# Altium PCB PCB1.PcbDoc
Units mil, origin at the board's own origin, x right, y up, seen from the top; angles counter-clockwise.
Board outline 1040 x 1460 mil, 2 copper layers (Top Layer, Bottom Layer); 25 components, 13 nets, 61 pads, 68 vias.
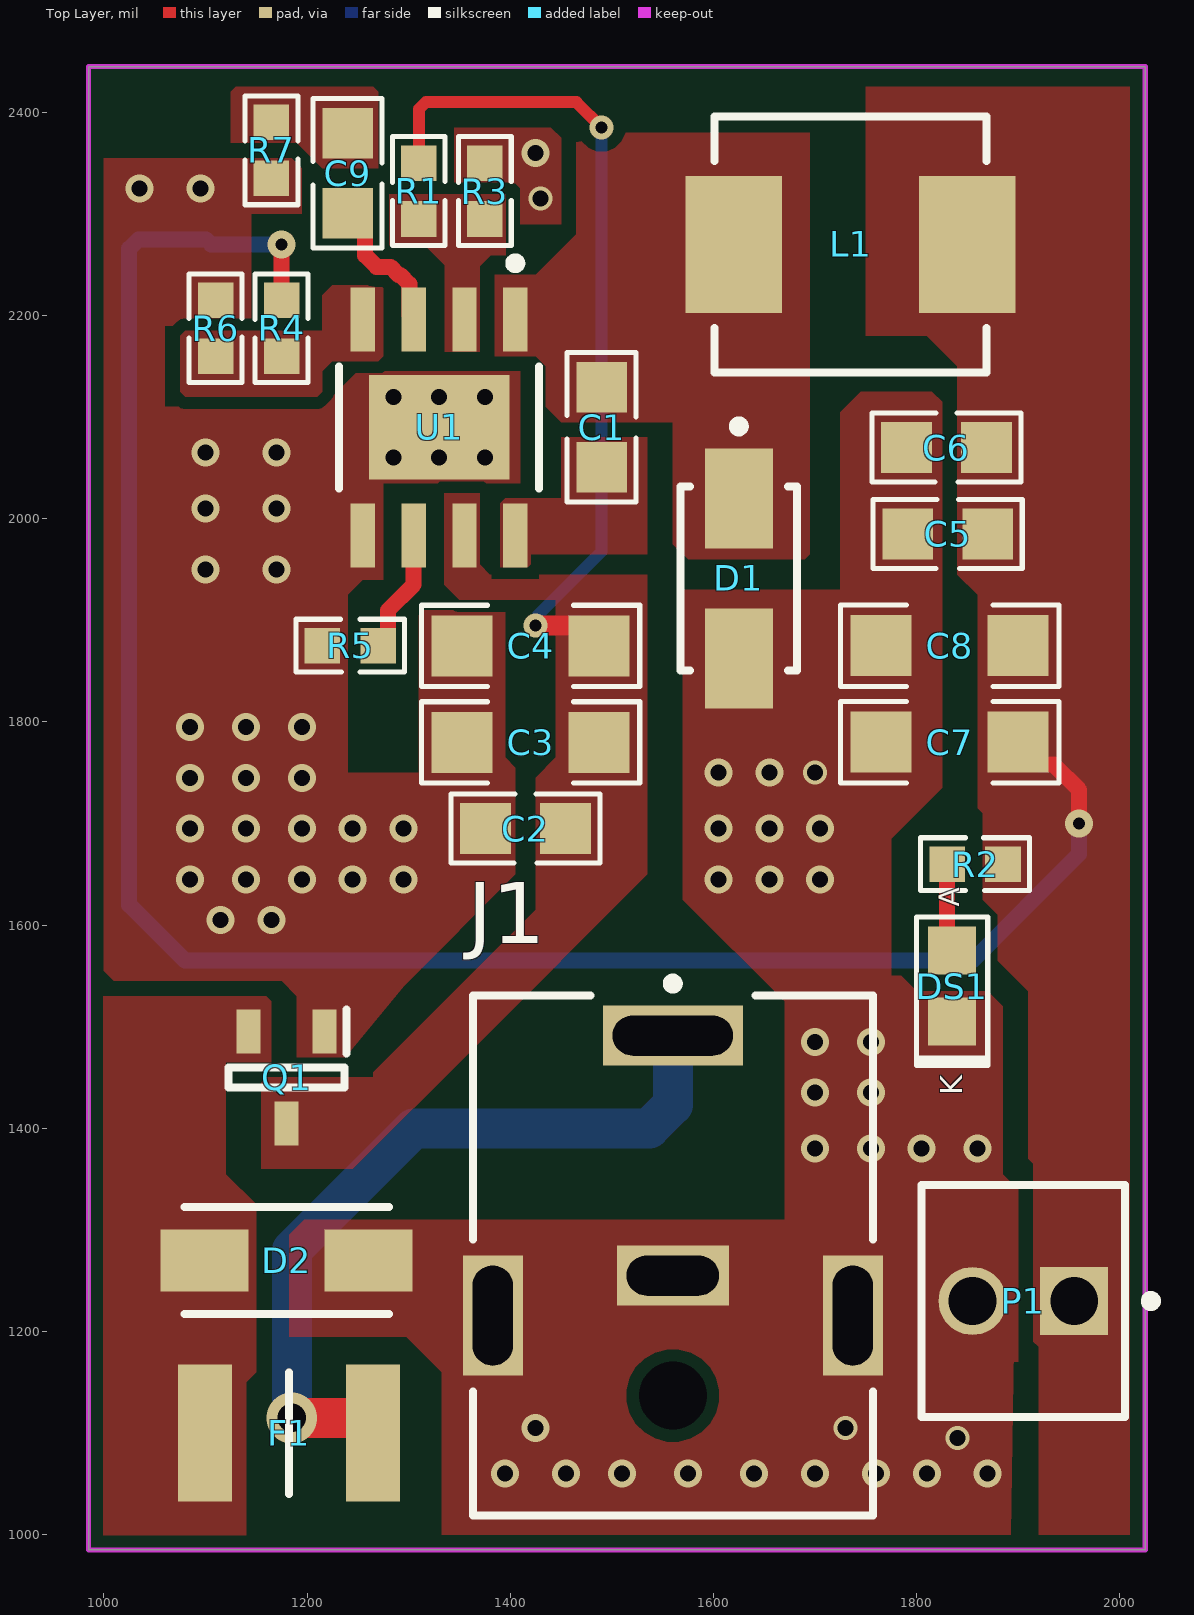
[diagram p0: Top Layer view]
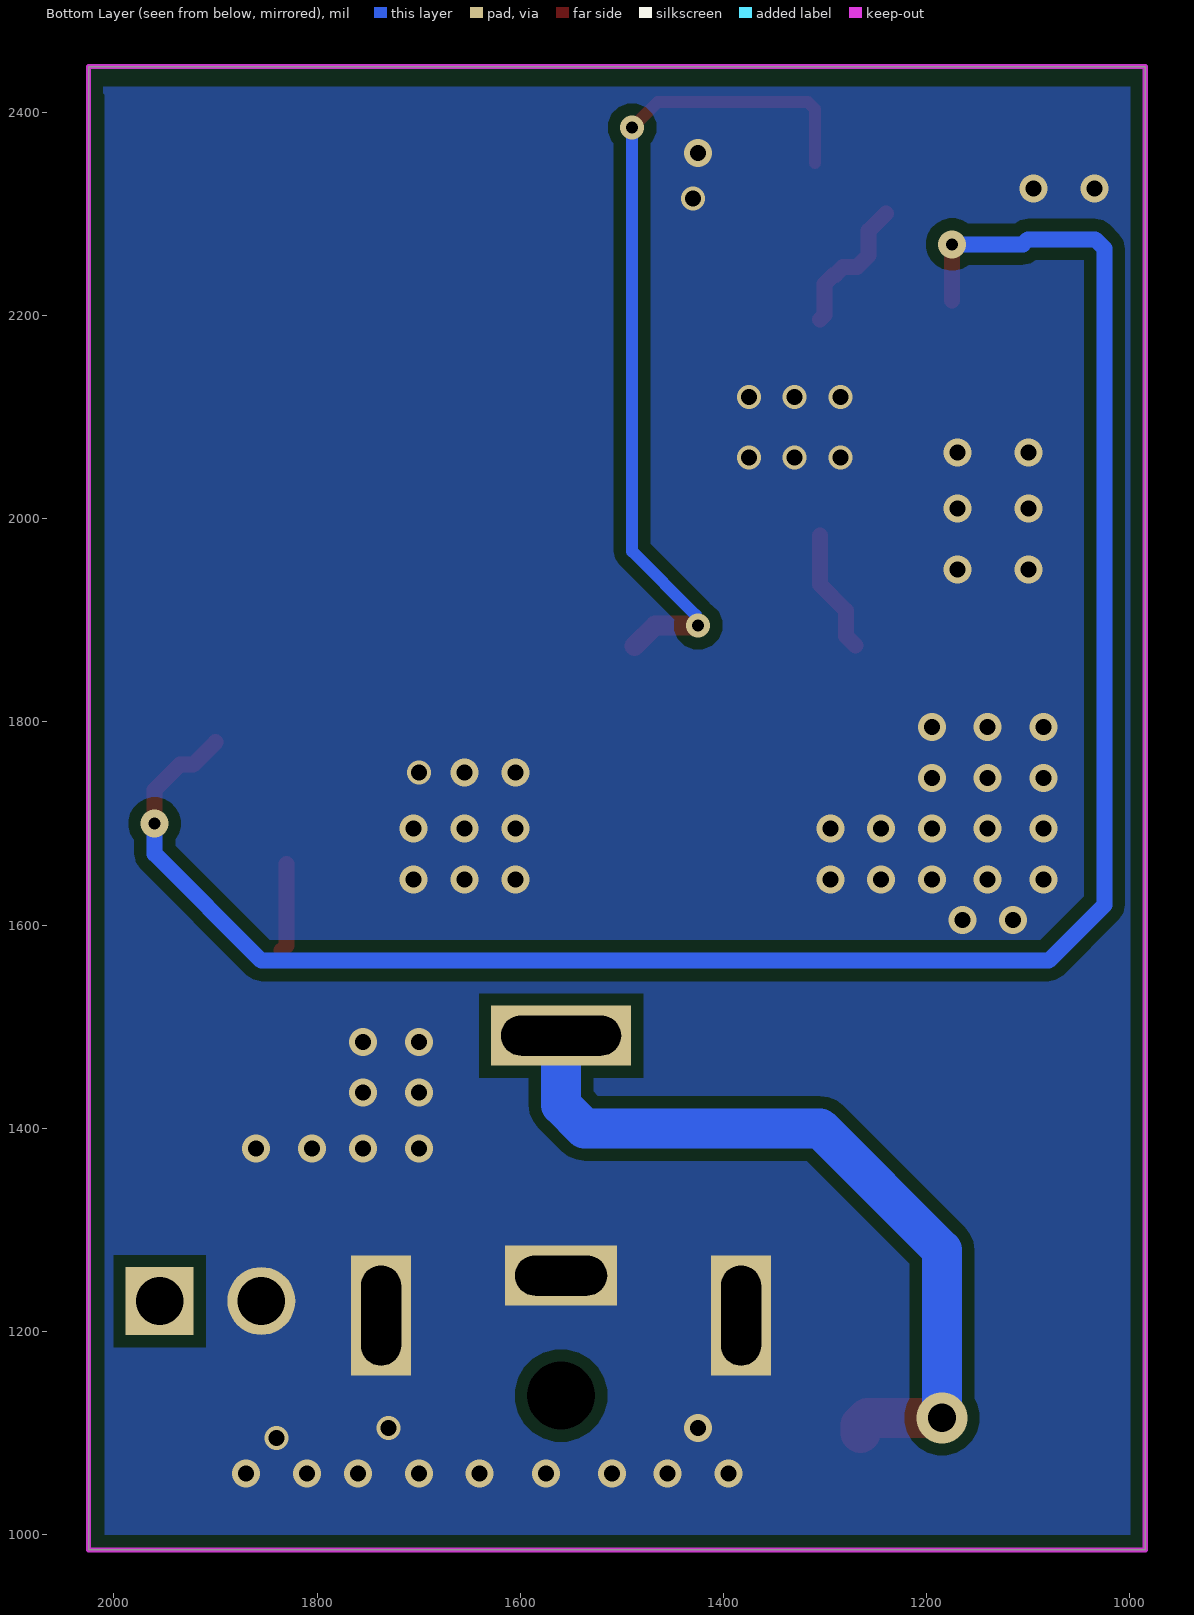
[diagram p1: Bottom Layer view, seen from below]
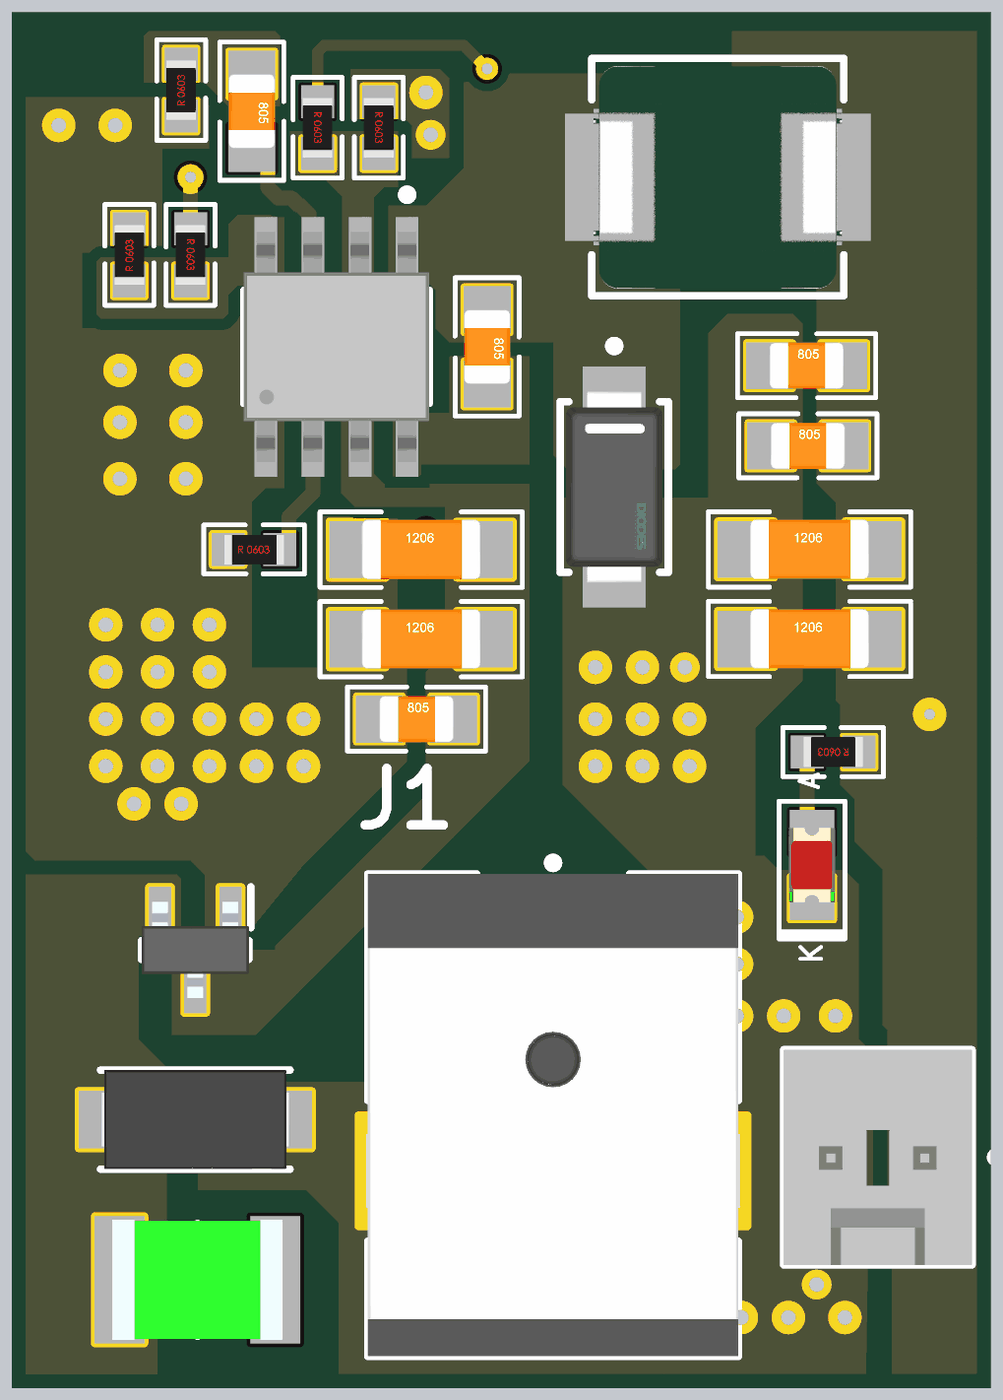
[diagram p2: 3D render of the assembled board from above, using the file's embedded part models]

## Layer stack, top to bottom
Top Solder: solder mask 0.4, Solder Resist, Dk 3.5
Top Layer: signal copper 1.4
Dielectric 1: dielectric 12.6, FR-4, Dk 4.8
Bottom Layer: signal copper 1.4
Bottom Solder: solder mask 0.4, Solder Resist, Dk 3.5

## Board outline
985,985 985,2445 2025,2445 2025,985 1625,985

## Design rules (kind name [scope] priority, off if disabled: settings)
Clearance [All] p1: gap=11.81 ignorepadtopadclearanceinfootprint=TRUE
HoleSize [All] p1: absolutevalues=TRUE maxlimit=118.11 minlimit=1 maxpercent=80.000 minpercent=20.000
PolygonConnect [All] p1: connectstyle=Direct reliefconductorwidth=10 reliefentries=4 polygonreliefangle="90 Angle" airgapwidth=10
RoutingVias [All] p1: holewidth=11.81 width=35.43 viastyle="Through Hole" minholewidth=11.81 minwidth=21.65 maxholewidth=23.62 maxwidth=27.56
SolderMaskExpansion [All] p1: expansion=4 istentingtop=FALSE
Width [All] p1: maxlimit=39.37 minlimit=11.81 preferedwidth=11.81
29 further rules are at their usual default settings.

## Components (designator, comment, footprint, x,y, rotation, side; value= is the part's Value field where it differs from the comment)
C1 "0.1uF" CAP_0805 1490,2090 r270 top
C2 "0.1uF" CAP_0805 1415,1695 r0 top
C3 "10uF" CAP_1206 1420,1780 r0 top
C4 "100uF" CAP_1206 1420,1875 r0 top
C5 "0.1uF" CAP_0805 1830.63,1985 r0 top
C6 "0.22uF" CAP_0805 1829.37,2070 r0 top
C7 "100uF" CAP_1206 1832.49,1780.2 r0 top
C8 "100uF" CAP_1206 1832.49,1875.2 r0 top
C9 "150pF" CAP_0805 1240,2340 r270 top
D1 "B340A-13-F" FP-SMA-MFG 1625,1941.26 r270 top
D2 "824501121" DIONM5127X250N 1180,1270 r180 top
DS1 "GREEN LED" LED_0805 1835,1540 r90 top
F1 "MINIASMDC150F_16-2" FUSC4632X48N 1182.32,1100 r180 top
J1 "PJ-063AH" CUI-PJ-063AH_V 1560,1255 r270 top
L1 "ETQ-P3M150KVN" FP-PCC-M0630M-LP-MFG 1735,2270 r0 top value=15uH
P1 "22-27-2021" MOLX-22-27-2021_V 1905,1230 r180 top
Q1 "BSS308PE" SOT95P260X110-3N 1180,1450 r270 top
R1 "100K" RES_0603 1310,2322.5 r270 top
R2 "2k" RES_0603 1857.5,1660 r180 top
R3 "24.9K" RES_0603 1375,2322.5 r270 top
R4 "210K" RES_0603 1175,2187.5 r270 top
R5 "100K" RES_0603 1242.5,1875 r0 top
R6 "40.2K" RES_0603 1110,2187.5 r90 top
R7 "100K" RES_0603 1165,2362.5 r90 top
U1 "MP1584EN-LF-Z" FP-MP1584EN-LF-Z-MFG 1330,2090 r270 top

## Footprints (in the part's own frame and the unit in brackets; to place one, negate y for a bottom-side part, rotate by r counter-clockwise, add the part's x,y. Pads: shape width x height; smd on the part's side, far side on the other; paste and mask are expansions set on the pad)
CAP_0805 [mil] "Ceramic Capacitor"
  rect 50x50 smd mask+3: 1(-39.37,0) 2(39.37,0)
  silkscreen extent -73,-34 73,34, body extent -39,-25 39,25, height 31
CAP_1206 [mil] "Ceramic Capacitor"
  rect 60x60 smd: 1(-67.49,-0.2) 2(67.51,-0.2)
  silkscreen extent -107,-40 108,40, body extent -63,-31 63,32, height 39
CUI-PJ-063AH_V [mm] "THD, 2-Leads, Body 13x10mm, Height 9mm"
  rect 1.5x3.5 hole 1 slot 3 at 90 deg: 1(-6,0)
  rect 1.5x2.8 hole 1 slot 2.3 at 90 deg: 2(0,0)
  rect 3x1.5 hole 1 slot 2.5 at 0 deg: 3(1,4.5) 4(1,-4.5)
  round 1.4 hole 1.7 unplated: 5(3,0)
  silkscreen extent -7.42,-5 6,5, body extent -7,-5.15 6,5.15, height 9
DIONM5127X250N [mm]
  rect 2.2x1.55 smd: 1(-2.05,0) 2(2.05,0)
  silkscreen extent -2.56,-1.34 2.56,1.34, body extent -2.56,-1.34 2.56,1.34, height 2.5
FP-MP1584EN-LF-Z-MFG [mm]
  rect 1.6x0.61 smd paste+0 mask+0: 1(-2.7,1.905) 2(-2.7,0.635) 3(-2.7,-0.635) 4(-2.7,-1.905) 5(2.7,-1.905) 6(2.7,-0.635) 7(2.7,0.635) 8(2.7,1.905)
  rect 2.62x3.51 smd paste+0 mask+0: 9(0,0)
  silkscreen extent -4.22,-2.5 1.53,2.5, body extent -3.6,-2.6 3.6,2.6, height 0.25
FP-PCC-M0630M-LP-MFG [mil]
  rect 95x135 smd paste+0 mask+0: 1(-115,0) 2(115,0)
  silkscreen extent -134,-126 134,126, body extent -166,-130 166,130, height 10
FP-SMA-MFG [mm]
  rect 2.5x1.7 smd paste+0 mask+0: 1(-2,0) 2(2,0)
  silkscreen extent -3.92,-1.46 2.3,1.46, body extent -3.35,-1.56 3.35,1.56, height 0.25
FUSC4632X48N [mm]
  rect 1.35x3.43 smd: 1(-2.1,0) 2(2.1,0)
  silkscreen extent 0,-1.52 0,1.52, body extent -2.3,-1.62 2.3,1.62, height 0.48
LED_0805 [mm] "LED"
  rect 1.2x1.2 smd mask+0.076: A(0.889,0) K(-0.889,0)
  silkscreen extent -1.99,-0.89 1.73,0.89, body extent -1.01,-0.62 1.01,0.63, height 1.1
MOLX-22-27-2021_V [mm] "Header, 2-Leads, Body 5.8x5.08mm"
  rect 1.7x1.7 hole 1.19: 1(-1.27,0)
  round 1.7 hole 1.19: 2(1.27,0)
  silkscreen extent -3.32,-2.9 2.54,2.9, body extent -2.54,-2.9 2.54,2.9, height 11.72
RES_0603 [mil] "CASE: 0603"
  rect 35x35 smd mask+3: 1(-27.5,0) 2(27.5,0)
  silkscreen extent -53,-26 54,26, body extent -31,-16 31,16, height 18
SOT95P260X110-3N [mm]
  rect 1.1x0.6 smd: 1(-1.15,0.95) 2(-1.15,-0.95) 3(1.15,0)
  silkscreen extent -1.7,-1.45 0.25,1.5, body extent -1.3,-1.45 1.3,1.45, height 1.1

## Part data
C1 C2 C5: library part CAP_0.1uF-50V-20%-0805, "0.1µF ±20% 50V Ceramic Capacitor X7R 0805 (2012 Metric)", Alternate Part Number-1=NA, Case/Package=0805, Manufacturer="Samsung Electro-Mechanics", Manufacturer Part Number=CL21B104MBCNNNC, Supplier Part Number-1=0805B104K500CT, Supplier-1=SIRICOM
C3: library part CAP_10uF-50V-10%-1206, "10µF ±10% 50V Ceramic Capacitor X7R 1206 (3216 Metric)", Alternate Part Number-1=GRT31CR61H106ME01L, Case/Package=1206, Manufacturer=KEMET, Manufacturer Part Number=CL31B106KBHNNNE, Supplier Part Number-1=CC1206KKX5R9BB106, Supplier-1=SIRICOM
C4 C7 C8: library part CAP_0.1uF-50V-5%-1206, "100µF ±5% 50V Ceramic Capacitor X7R 1206 (3216 Metric)", Alternate Part Number-1=NA, Case/Package=1206, Manufacturer=KEMET, Manufacturer Part Number=C1206C104J5RACTU, Supplier Part Number-1=1206B104J500CT, Supplier-1=SIRICOM
C6: library part CAP_0.22uF-50V-10%-0805, "0.22µF ±10% 50V Ceramic Capacitor X7R 0805 (2012 Metric)", Alternate Part Number-1=0805F224M500NT, Case/Package=0805, Manufacturer=Murata, Manufacturer Part Number=GRM21BR71H224KA01L, Supplier Part Number-1=0805B224K500CT, Supplier-1=SIRICOM
C9: library part CAP_150pF-50V-10%-0805, "150pF ±10% 50V Ceramic Capacitor C0G, NP0 0805 (2012 Metric)", Alternate Part Number-1=NA, Case/Package=0805, Manufacturer="AVX Corporation", Manufacturer Part Number=08055A151KAT2A, Supplier Part Number-1="478-10501-1-ND - Cut Tape (CT)", Supplier-1=Digikey
D1: library part CMP-1667-00003-3, "DIODE SCHOTTKY 40V 3A SMA", Average Rectified Current=3A, Capacitance=250pF, Case/Package=SMA, Forward Voltage=500mV, Max Forward Surge Current (Ifsm)=80A, Max Operating Temperature=125°C, Max Repetitive Reverse Voltage (Vrrm)=40V, Max Reverse Current=500uA, Min Operating Temperature=-55°C, Package Quantity=5000, Contact Plating=Tin, Current=3A, Current Rating=3A, Element Configuration=Single, Forward Current=3A, Height=2.3mm, Lead Free="Lead Free", Length=4.6mm, Max Reverse Voltage (DC)=40V, Mount="Surface Mount", Number of Pins=2, Output Current=3A, Packaging="Tape and Reel", Peak Non-Repetitive Surge Current=80A, Polarity=Standard, Radiation Hardening=No, REACH SVHC="No SVHC", RoHS Compliant=Yes, Series=-, Termination=SMD/SMT, Voltage=40V, Voltage Rating (DC)=40V, Weight=0.002258oz, Width=2.92mm
D2: "TVS Diode (Bi-directional)", Manufacturer_Name="Wurth Elektronik", Mouser Part Number=710-824501121, Datasheet Link=http://uk.rs-online.com/web/p/products/9217298P, Height=2.5mm, Manufacturer_Part_Number=824501121, Mouser Price/Stock=https://www.mouser.co.uk/ProductDetail/Wurth-Elektronik/824501121?qs=16w8nSHsg3tpLWkpbtDAQg%3D%3D
DS1: library part LED_GREEN-2.2-20mA-0805, "Green 569nm LED Indication - Discrete 2.1V 0805 (2012 Metric)", Alternate Part Number-1=NA, Case/Package=0805, Manufacturer="Vishay Lite-On", Manufacturer Part Number=LTST-C171GKT, Supplier Part Number-1=LTST-C171GKT, Supplier-1="SP ROAD"
F1: "Fuse", Arrow Part Number=MINIASMDC150F/16-2, Manufacturer_Name=LITTELFUSE, Mouser Part Number=650-MINIASMDC150F/16, Arrow Price/Stock=https://www.arrow.com/en/products/miniasmdc150f16-2/littelfuse, Datasheet Link=https://componentsearchengine.com/Datasheets/1/MINIASMDC150F_16-2.pdf, Height=0.48mm, Manufacturer_Part_Number=MINIASMDC150F/16-2, Mouser Price/Stock=https://www.mouser.com/Search/Refine.aspx?Keyword=650-MINIASMDC150F%2F16
J1: library part CMP-2000-06898-1, "Through Hole Right Angle DC Power Jack, 8 A, 2 mm Center Pin, 2 Position, -25 to 85 degC, RoHS, Bulk", Current Rating=8A, Flammability Rating=UL94V-0, Insulation Resistance=100MOhms, Manufacturer=CUIInc., Operating Temperature Range=-25Cto+85C, Package Description="2-Pin Through Hole Device, Body 13 x 10 mm, Height 9 mm", Voltage Rating=24V, Brand=CUI, Connector Type=DCPowerJack, Contact Gender=Male, Contact Material=Copper, Contact Plating=Nickel, Datasheet URL=http://www.cui.com/product/resource/pj-063ah.pdf, Datasheet Version="Rev. 1.02, 03/2016", Factory Pack Quantity=500, Housing Material=PolybutyleneTerephthalate(PBT), Inside Contact Diameter=2mm, Manufacturer URL=http://www.cui.com/, Mounting Angle=Right, Mounting Style=KinkedPin, Mounting Technology=ThroughHole, Outside Contact Diameter=6.5mm, Package Reference=PJ-063AH, Product=Jacks, Product Category=DCPowerConnectors, RoHS=True, Termination Style=ThroughHole
L1: library part CMP-05439-000005-1, "FIXED IND 15UH 3A 109.12 MOHM", Inductance=15uH, Manufacturer=Panasonic, Package=PCC-M0630M-LP, Rms Current=2.5A, Saturation Current=5.1A, Series Resistance=109.12mΩ, Temperature="-55°C to +155°C", Temperature Range High=+155°C, Temperature Range Low=-55°C, Test Frequency=100kHz, Tolerance=20%, Automotive=Yes, Automotive Grade="Grade 0", Category=Ind, ComponentLink2Description=Datasheet, ComponentLink2URL=https://industrial.panasonic.com/cdbs/www-data/pdf/AGL0000/AGL0000C63.pdf, Core Material="Metal Composite", Device Class L1="Passive Components", Device Class L2=Inductors, Device Class L3="Fixed Inductors", Digikey Description="FIXED IND 15UH 3A 109.12 MOHM", Height=3mm, Lead Free=Yes, Manufacturer Part Number=ETQ-P3M150KVN, Octopart=https://octopart.com/etqp3m150kvn-panasonic-71577976, RoHS=TRUE, Shielding=true, Standoff Height=0.05mm
P1: library part CMP-2000-05537-1, "Male Header, Pitch 2.54 mm, 1 x 2 Position, Height 11.7 mm, Tail Length 3.56 mm, 0 to 75 degC, RoHS, Bulk", Current - Max=4A, Manufacturer=Molex, Operating temperature=0°Cto+75°C, Package Description="2-Leads Header, Body 5.08 x 5.8 mm, Pitch 2.54 mm", Package Version="Rev. BC, 02/2012", PartNumber=0022272021, Voltage - Max=250V, Contact Material=Tinplatedbrass, Current Rating=4A, Datasheet URL=http://www.molex.com/pdm_docs/sd/022272021_sd.pdf, Datasheet Version="Rev. F, 06/2009", Housing Material=Nylon(UL94V-0), Manufacturer URL=http://www.molex.com/, Mounting Technology=ThroughHole, No. of Positions=2, No. of Rows=1, Orientation=Vertical, Package Reference=22-27-2021, Pitch=2.54mm, Voltage Rating=250V
Q1: "Transistor", Manufacturer_Name=Infineon, Datasheet Link=http://www.infineon.com/dgdl/Infineon-BSS308PE-DS-v02_03-en.pdf?fileId=db3a304330f686060131099c80400073, Height=1.1mm, Manufacturer_Part_Number=BSS308PE
R1 R2 R3 R4 R5 R6 R7: library part RES_100K-0.1W-1%-0603, "100 kOhms ±1% 0.1W, 1/10W Chip Resistor 0603 (1608 Metric) Automotive AEC-Q200 Thick Film", Alternate Part Number-1=NA, Case/Package=0603, Manufacturer="Stackpole Electronics", Manufacturer Part Number=RMCF0603FT100K, Supplier Part Number-1=RMCF0603FT100K, Supplier-1=Arrow
U1: library part CMP-57379-000006-1, "IC REG BUCK ADJ 3A", Ambient Temperature Range High=+85°C, Ambient Temperature Range Low=-20°C, Manufacturer="Monolithic Power Systems", Max Junction Temp=+125°C, Max Power Dissipation=2.5W, Max Supply Voltage=28V, Min Supply Voltage=4.5V, Nominal Supply Current=100uA, Output Current=3A, Output Voltage=0.8-25V, Switching Frequency=100-1500kHz, Temperature="-20°C to +125°C", Automotive=No, Category=IC, ComponentLink2Description=Datasheet, ComponentLink2URL=https://www.monolithicpower.com/en/documentview/productdocument/index/doc_url/L01QMTU4NF9yMS4wLnBkZg%3D%3D/release_date/MjAwOS0wNC0wOSAwMDowMDowMA%3D%3D/, Device Class L1="Integrated Circuits (ICs)", Device Class L2="Power Management ICs", Device Class L3="Voltage Regulators - Switching", Digikey Description="IC REG BUCK ADJ 3A", Height=1.7mm, Ipc Land Pattern Name=SOIC127P600X150-8, Lead Free=Yes, Manufacturer Part Number=MP1584EN-LF-Z, Number Of Outputs=1, Octopart=https://octopart.com/mp1584en-lf-z-monolithic+power+systems-18629680, Output Type=AdjustableProgrammable, Package=MP1584EN-LF-Z, RoHS=TRUE, Standoff Height=0mm, Switching Topology=Buck, Temperature Range High=+125°C, Temperature Range Low=-20°C

## Via types
v1: diameter 27.56, hole 15.75, Top Layer to Bottom Layer, 53 vias
v2: diameter 23.62, hole 15.75, Top Layer to Bottom Layer, 10 vias
v3: diameter 27.56, hole 11.81, Top Layer to Bottom Layer, 2 vias
v4: diameter 23.62, hole 11.81, Top Layer to Bottom Layer, 2 vias
v5: diameter 50, hole 28, Top Layer to Bottom Layer, 1 vias

## Nets (pads, with @x,y where several pads share a name; then routed paths per layer and width w, separated by ;. In a path a pad name is that pad's centre, name@x,y a point inside that pad or via, vN(x,y) a via of type N, cw(c..) or ccw(c..) an arc to the next point about the centre after c; other vN are vias at no path point)
FP_PIN: R4.2 R6.1 U1.4
GND_ISO: C2.1 C3.1 C4.1 C5.1 C6.1 C7.1 C8.1 D1.2 D2.1 DS1.K J1.2 J1.3 J1.4 P1.2 Q1.1 R3.1 R5.1 R6.2 R7.1 U1.5 U1.9
  other v1: 1395,1060 1455,1060 1510,1060 1575,1060 1640,1060 1700,1060 1760,1060 1810,1060 1870,1060 1425,1105 1700,1380 1755,1380 1805,1380 1860,1380 1700,1435 1755,1435 1700,1485 1755,1485 1115,1605 1165,1605 1085,1645 1140,1645 1195,1645 1245,1645 1295,1645 1605,1645 1655,1645 1705,1645 1085,1695 1140,1695 1195,1695 1245,1695 1295,1695 1605,1695 1655,1695 1705,1695 1085,1745 1140,1745 1195,1745 1605,1750 1655,1750 1085,1795 1140,1795 1195,1795 1100,1950 1170,1950 1100,2010 1170,2010 1100,2065 1170,2065 1035,2325 1095,2325 1425,2360
  other v2: 1840,1095 1730,1105 1700,1750 1285,2060 1330,2060 1375,2060 1285,2120 1330,2120 1375,2120 1430,2315
NetC1_1: C1.1 D1.1 L1.1 U1.1
NetC1_2: C1.2 U1.8
NetC9_1: C9.1 R7.2
NetC9_2: C9.2 U1.3 | length 140.2
  Top Layer w15.75: C9.2 1257.13,2283.5 1257.13,2259.22 1268.57,2247.78 1282.22,2247.78 1290,2240 1291.64,2240 1300.87,2230.78 1300.87,2200.43 U1.3
NetD2_2: D2.2 F1.2 Q1.2
NetDS1_A: DS1.A R2.2 | length 87.1
  Top Layer w15.75: R2.2 1830,1580 DS1.A
NetF1_1: F1.1 J1.1 | length 758.4
  Top Layer w39.37: v5(1185,1115) 1258.11,1115 1265,1108.11 F1.1
  Bottom Layer w39.37: v5(1185,1115) 1185,1280 1305,1400 1536.94,1400 1560,1423.06 J1.1
NetR1_2: R1.2 R3.2 U1.2
NetR5_2: R5.2 U1.6 | length 123.2
  Top Layer w15.75: R5.2 1279.63,1884.63 1279.63,1909.63 1305,1935 U1.6
SMPS_OUT: C5.2 C6.2 C7.2 C8.2 L1.2 P1.1 R2.1 R4.1 | length 2000.5
  Top Layer w15.75: R4.1 v3(1175,2270) ; C7.2 1922.13,1757.87 1935.2,1757.87 1960,1733.08 v3(1960,1700)
  Bottom Layer w15.75: v3(1175,2270) 1105.51,2270 1100.51,2275 1034.22,2275 1025,2265.78 1025,1620 1080,1565 1855,1565 1960,1670 v3(1960,1700)
VOUT_12V: C2.2 C3.2 C4.2 Q1.3 R1.1 U1.7 | length 834.1
  Top Layer w11.81: R1.1 1310,2403.08 1316.92,2410 1465,2410 v4(1490,2385)
  Top Layer w19.68: v4(1425,1895) 1455.82,1895 1455.86,1894.96 1467.35,1894.96 C4.2
  Bottom Layer w11.81: v4(1425,1895) 1427.26,1897.26 1427.26,1905.08 1490,1967.82 v4(1490,2385)
pads on no net: J1.5

## Polygon pours and split planes (outlines as drawn)
SMPS_OUT on Top Layer "SMPS_OUT_L01_P024" (solid, remove dead copper, pour order 24): 1750,2425 2010,2425 2010,1000 1920,1000 1920,1185 1915,1190 1915,1365 1910,1370 1910,1535 1880,1565 1880,1610 1865,1625 1865,1710 1860,1715 1860,1725 1860,1925 1840,1945 1840,2150 1810,2180 1750,2180 1810,2180 1750,2180
GND_ISO on Top Layer "GND_ISO_L01_P012" (solid, remove dead copper, pour order 12): 1892.5,1000 1857.5,1000 1332.5,1000 1332.5,1160 1297.5,1195 1182.5,1195 1182.5,1295 1197.5,1310 1897.5,1310
GND_ISO on Top Layer "GND_ISO_L01_P023" (solid, remove dead copper, pour order 23): 1725,1930 1725,2105 1745,2125 1815,2125 1825,2115 1825,1735 1775,1685 1775,1550 1785,1550 1800,1535 1870,1535 1885,1520 1885,1355 1900,1340 1900,1170 1795,1170 1740,1115 1670,1115 1670,1525 1570,1625 1570,1930 1570,1625 1570,1930
GND_ISO on Top Layer "GND_ISO_L01_P018" (solid, remove dead copper, pour order 18): 1250,2145 1410,2145 1410,2035 1275,2035 1275,1940 1255,1940 1240,1925 1240,1472.27 1237.73,1470 1190,1470 1190,1530 1175,1545 1010,1545 1000,1555 1000,2110 1215,2110
NetD2_2 on Top Layer "NETD2_2_L01_P003" (solid, remove dead copper, pour order 3): 1140,990.34 989.43,990.34 989.43,1525.94 995,1530 1160,1530 1165,1525 1165,1465 1120,1465 1120,1355 1150,1325 1150,1160 1140,1150
GND_ISO on Top Layer "GND_ISO_L01_P028" (solid, remove dead copper, pour order 28): 1345,2385 1440,2385 1450,2375 1450,2290 1410,2290 1410,2325 1405,2330 1345,2330 1345,2365
NetC1_1 on Top Layer "NETC1_1_L01_P013" (solid, remove dead copper, pour order 13): 1385,2240 1425,2240 1465,2280 1465,2380 1695,2380 1695,1965 1690,1960 1575,1960 1560,1975 1560,2095 1450,2095 1435,2110 1435,2150 1425,2160 1385,2160 1385,2185
NetC1_2 on Top Layer "NETC1_2_L01_P021" (solid, remove dead copper, pour order 21): 1450,2080 1535,2080 1535,2000 1535,1965 1450,1965 1420,1965 1420,1955 1415,1950 1390,1950 1390,2015 1395,2020 1450,2020 1450,2035
GND_ISO on Top Layer "GND_ISO_L01_P020" (solid, remove dead copper, pour order 20): 1185,2355 1195,2345 1195,2300 1145,2300 1145,2190 1060,2190 1060,2035 1000,2035 1000,2355
NetC9_1 on Top Layer "NETC9_1_L01_P019" (solid, remove dead copper, pour order 19): 1215,2345 1190,2370 1125,2370 1125,2420 1130,2425 1265,2425 1270,2420 1270,2415 1270,2345 1260,2345
FP_PIN on Top Layer "FP_PIN_L01_P017" (solid, remove dead copper, pour order 17): 1275,2160 1270,2155 1225,2155 1215,2145 1215,2125 1210,2120 1080,2120 1075,2125 1075,2180 1080,2185 1215,2185 1215,2220 1225,2230 1275,2230 1225,2230 1275,2230
NetR1_2 on Top Layer "NETR1_2_L01_P015" (solid, remove dead copper, pour order 15): 1395.73,2319.27 1395.73,2259.27 1380.73,2259.27 1370,2248.53 1370,2164.27 1335.73,2164.27 1335.73,2249.27 1315.73,2269.27 1280.73,2269.27 1280.73,2319.27 1280.73,2269.27 1280.73,2319.27
GND_ISO on Top Layer "GND_ISO_L01_P014" (solid, remove dead copper, pour order 14): 1190,1470 1190,1705 1235,1750 1405,1750 1405,1650 1295,1540 1237.73,1470 1200,1470
GND_ISO on Top Layer "GND_ISO_L01_P007" (solid, remove dead copper, pour order 7): 1315,1910 1310,1905 1310,1745 1340,1715 1340,1650 1405,1650 1405,1755 1395,1765 1395,1910 1375,1910
VOUT_12V on Top Layer "VOUT_12V_L01_P005" (solid, remove dead copper, pour order 5): 1160,1450 1265,1450 1265,1455 1425,1615 1425,1745 1445,1765 1445,1920 1350,1920 1335,1935 1335,2025 1370,2025 1370,1955 1380,1945 1535,1945 1535,1650 1365,1480 1245,1360 1155,1360 1155,1445 1155,1360 1155,1445
GND_ISO on Bottom Layer "GND_ISO_L02_P026" (solid, remove dead copper, pour order 26): 2016.85,2425 2009.29,2417.44 2009.29,1000 995,1000 995,2425

## Keep-outs
Keep-Out Layer:
  the board outline again, w5

## Text inside footprints (layer, text, board x,y; h text height)
DS1: Top Overlay "A" at 1841.89,1618.25 h20 r90; Top Overlay "K" at 1844.85,1432.72 h22 r90